# Allegro board PCB.brd
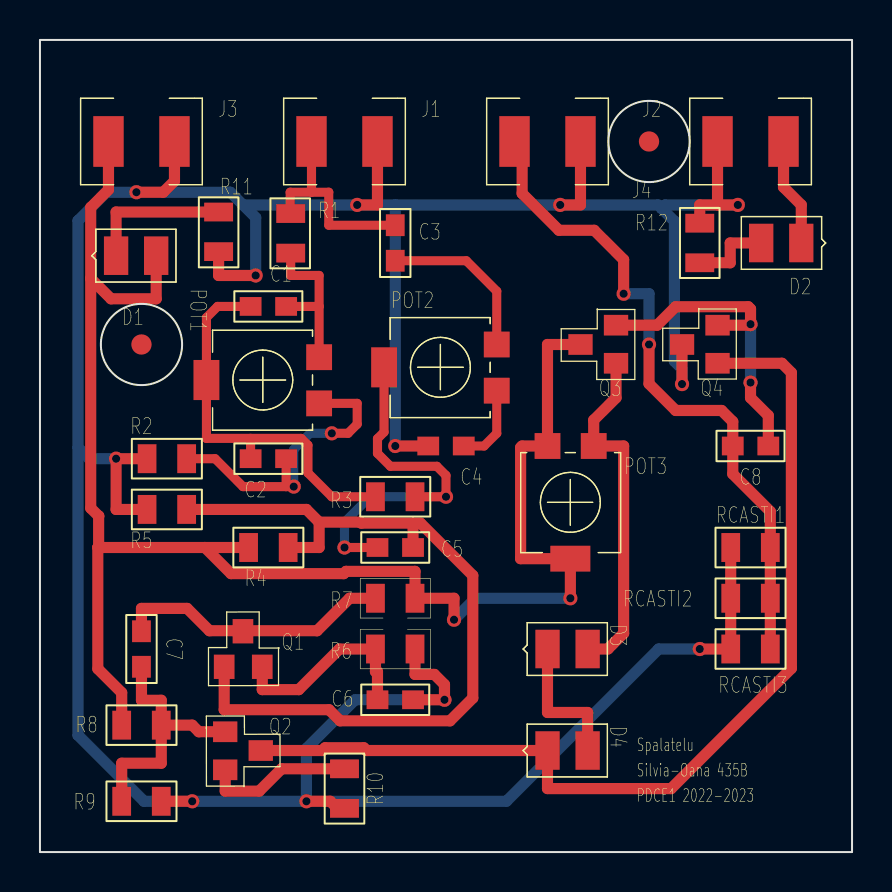
[diagram p0: board, top side]
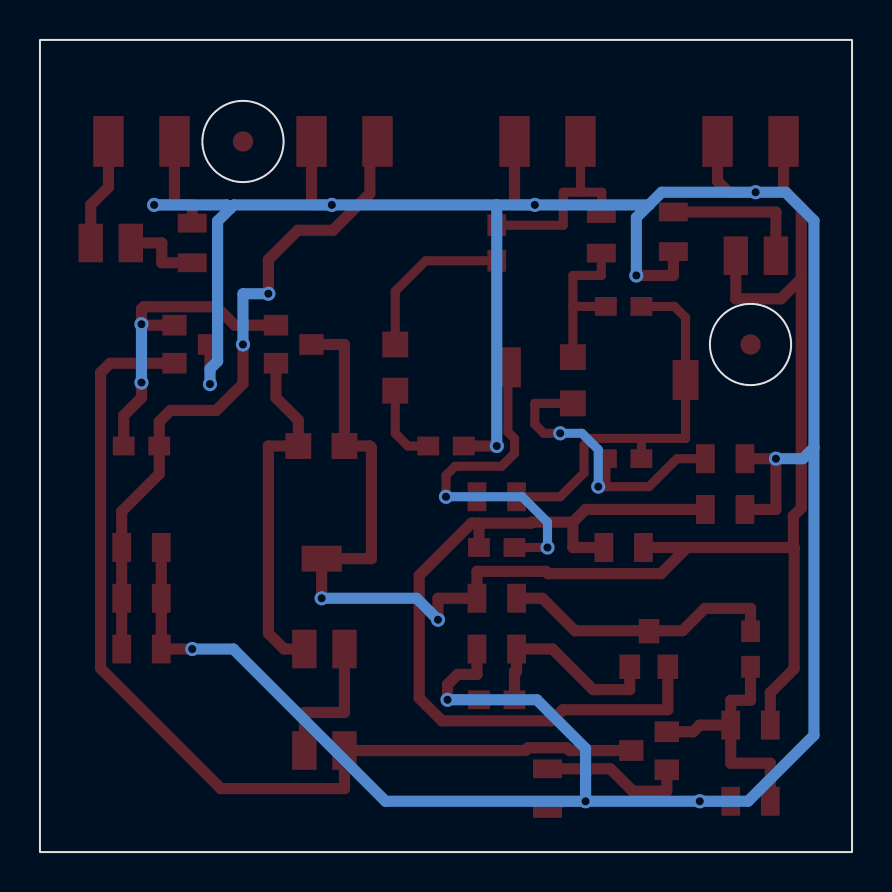
[diagram p1: board, bottom side, seen from below]

Outline 40.64 x 40.64 mm; copper layers: TOP, BOTTOM. Coordinates in mm from the lower left corner of the outline.
Outline path: rectangle 0,0 40.64,40.64

## Design rules (mm)
nets with their own width: min track width 0.457; nets N60447 N60661 N60709 N60871 N61075 N61103 N61107
nets with their own width: min track width 0.559; nets 0 N60475 N60681 N60715 N60839 N60845 N61049 N61099 N61311 N61369 N61405 N62196 N63917 N606950 N610870

## Placement (name value [footprint] x y rotation side)
C1  22n  [CAPC2008X126N_0805]  11.43 27.3 0 top
C2  220n  [CAPC2008X126N_0805]  11.43 19.68 180 top
C3  2.2n  [CAPC2008X126N_0805]  17.78 30.48 90 top
C4  22n  [CAPC2008X126N_0805]  20.32 20.32 0 top
C5  4.7u  [CAPC2008X126N_0805]  17.78 15.24 0 top
C6  4.7u  [CAPC2008X126N_0805]  17.78 7.62 180 top
C7  4.7u  [CAPC2008X126N_0805]  5.08 10.16 270 top
C8  4.7u  [CAPC2008X126N_0805]  35.56 20.32 180 top
D1  LED  [SMD0805]  3.81 29.84 0 top
D2  LED  [SMD0805]  38.1 30.48 180 top
D3  1N4148  [SMD0805]  25.4 10.16 0 top
D4  1N4148  [SMD0805]  25.4 5.08 0 top
J1  IN  [1210RF_WV_12D]  15.24 35.56 0 top
J2  OUT  [1210RF_WV_12D]  25.4 35.56 0 top
J3  VCC  [1210RF_WV_12D]  5.08 35.56 0 top
J4  -VCC  [1210RF_WV_12D]  35.56 35.56 0 top
NOREF  -  []  0 40.64 0 top
NOREF#2  -  [unnamed#2]  5.08 25.4 0 top
NOREF#3  -  [unnamed#2]  30.48 35.56 0 top
NOREF#4  -  []  40.64 0 90 top
POT1  10k  [TS53YL]  13.97 24.77 0 top
POT2  10k  [TS53YL]  22.86 25.4 0 top
POT3  10k  [TS53YL]  25.4 20.32 90 top
Q1  BC846/INF  [SOT23]  10.16 10.16 90 top
Q2  BC846/INF  [SOT23]  10.16 5.08 0 top
Q3  BC846/INF  [SOT23]  27.94 25.4 180 top
Q4  BC856/INF  [SOT23]  33.02 25.4 180 top
R1  1.5k  [RES2012X50N_0805]  12.55 30.96 90 top
R2  51  [RES2012X50N_0805]  6.35 19.68 0 top
R3  2.2k  [RES2012X50N_0805]  17.78 17.78 0 top
R4  220k  [RES2012X50N_0805]  11.43 15.24 180 top
R5  47k  [RES2012X50N_0805]  6.35 17.14 0 top
R6  2.7k  [RES2012X50N_0805]  17.78 10.16 180 top
R7  9.1k  [RES2012X50N_0805]  17.78 12.7 0 top
R8  100k  [RES2012X50N_0805]  5.08 6.35 180 top
R9  6.8K  [RES2012X50N_0805]  5.08 2.54 180 top
R10  220  [RES2012X50N_0805]  15.24 3.17 90 top
R11  1k  [RES2012X50N_0805]  8.94 31.04 90 top
R12  1k  [RES2012X50N_0805]  33.02 30.48 270 top
RCASTI1  1.8k  [RES2012X50N_0805]  35.56 15.24 0 top
RCASTI2  1.8k  [RES2012X50N_0805]  35.56 12.7 0 top
RCASTI3  1.8k  [RES2012X50N_0805]  35.56 10.16 0 top

## Library data of the parts
C1-C8 = C
D1-D4 = 1N4148_0
J1-J4 = CON2
POT1-POT3 = POT
Q1-Q3 = BC846/INF_1
Q4 = BC856/INF_0
R1-R12 RCASTI1-RCASTI3 = R

## Footprints (pads in the part's own frame, mm; a bottom-side part is the same pattern mirrored in y, then rotated)
1210RF_WV_12D
  rect 1.524x2.54 smd: 1(-1.651,0) 2(1.651,0)
CAPC2008X126N_0805
  rect 1.092x0.94 smd: 1(-0.889,0) 2(0.889,0)
RES2012X50N_0805
  rect 0.94x1.448 smd: 1(-0.991,0) 2(0.991,0)
SMD0805
  rect 1.219x1.93 smd: A(2.007,0) C(0,0)
SOT23
  rect 1.219x1.036 smd: 1(-0.889,0.94) 2(-0.889,-0.965) 3(0.889,0)
TS53YL
  rect 1.295x1.295 smd: 1(0,0) 3(0,-2.311)
  rect 1.295x2.007 smd: 2(-5.639,-1.143)
unnamed#2
  round 1.016 smd: (0,0)

## Nets
0: C4.1 C6.1 J1.2 J2.2 J3.2 J4.1 Q4.3 R2.1 R5.1 R6.1 R9.1 R10.1 R11.1 R12.1 RCASTI1.1 RCASTI2.1 RCASTI3.1
N60447: C3.2 J1.1 R1.2
N60475: D1.A J3.1 POT3.1 POT3.2(T) Q3.3 R4.2 R7.2 R8.2
N60661: C1.2 POT1.1 R1.1
N60681: D3.A POT3.3 Q3.1
N60709: C3.1 POT2.1
N60715: C7.2 Q2.1 R8.1 R9.2
N60839: C5.2 Q1.1 R4.1 R5.2
N60845: C7.1 Q1.3 R7.1
N60871: C1.1 C2.2 POT1.2(T) R3.1
N61049: C8.2 J2.1 RCASTI1.2 RCASTI2.2 RCASTI3.2
N61075: C5.1 POT2.2(T) R3.2
N61099: D4.C(CAT) Q2.3 Q4.1
N61103: C2.1 POT1.3 R2.2
N61107: C4.2 POT2.3
N61311: C6.2 Q1.2(E) R6.2
N61369: Q2.2(E) R10.2
N61405: D2.A R12.2
N62196: D2.C(CAT) J4.2
N63917: C8.1 Q3.2(E) Q4.2(E)
N606950: D3.C(CAT) D4.A
N610870: D1.C(CAT) R11.2

## Via types
v1: diameter 0.711, hole 0.406, TOP to BOTTOM, 22 vias

## Routing (per net, layer and track width the routed paths; a pad name or vN(x,y) marks a point on that pad's centre or on a via; arc(x,y) is an arc through that point)
0: length 179.8
  TOP w0.559: J4.1 33.91,32.38 ; 33.91,32.38 v1(34.92,32.38) ; 33.91,32.38 33.02,32.38 R12.1 33.27,31.47 ; v1(4.83,33.02) 6.17,33.02 6.73,33.58 J3.2 ; J1.2 16.89,32.38 v1(15.88,32.38) ; R6.1 18.77,8.89 19.74,8.89 20.24,8.38 v1(20.24,7.62) C6.1 ; C4.1 v1(17.78,20.32) ; v1(13.34,2.54) 14.53,2.54 14.88,2.18 R10.1 ; R11.1 8.94,28.85 v1(10.79,28.85) ; v1(32.13,23.42) Q4.3 ; R9.1 v1(7.62,2.54) ; J2.2 27.05,32.38 v1(26.04,32.38) ; v1(33.02,10.16) RCASTI3.1 RCASTI2.1 RCASTI1.1 ; R2.1 v1(3.81,19.68) 3.81,17.14 R5.1
  BOTTOM w0.559: v1(10.79,28.85) 10.79,31.75 10.16,32.38 ; v1(3.81,19.68) 2.46,19.68 1.91,20.24 ; 31.11,32.21 31.29,32.38 v1(34.92,32.38) ; 31.11,32.21 30.94,32.38 v1(26.04,32.38) 17.78,32.38 ; 31.11,32.21 31.75,31.57 31.75,24.56 32.13,24.18 v1(32.13,23.42) ; 10.16,32.38 v1(15.88,32.38) 17.78,32.38 ; 10.16,32.38 9.53,33.02 v1(4.83,33.02) 3.33,33.02 1.91,31.6 1.91,20.24 ; v1(33.02,10.16) 30.96,10.16 23.34,2.54 v1(13.34,2.54) ; 1.91,20.24 1.91,5.84 5.21,2.54 v1(7.62,2.54) v1(13.34,2.54) ; v1(13.34,2.54) 13.34,5.18 15.77,7.62 v1(20.24,7.62) ; v1(17.78,20.32) 17.78,32.38
N60447: length 10.5
  TOP w0.457: 13.59,33.02 J1.1 ; 13.59,33.02 12.52,33.02 12.52,31.95 R1.2 ; 13.59,33.02 14.45,33.02 14.45,31.37 C3.2
N60475: length 83.7
  TOP w0.559: 2.9,15.24 2.9,9.17 4.09,7.98 R8.2 ; 2.9,15.24 8.26,15.24 ; 2.9,15.24 2.94,15.28 2.94,16.81 ; 2.54,28.7 3.56,27.69 5.82,27.69 D1.A 5.89,29.77 ; 2.54,28.7 2.54,32.26 3.43,33.15 3.43,35.56 ; 2.54,28.7 2.54,17.21 2.94,16.81 ; v1(20.72,11.63) 20.72,12.7 R7.2 18.77,14.05 15.32,14.05 15.2,13.93 9.56,13.93 8.26,15.24 ; 2.95,16.81 2.94,16.81 ; Q3.3 25.4,25.4 POT3.1 24.13,20.32 24.05,20.24 24.05,14.68 POT3.2 v1(26.54,12.7) ; 8.26,15.24 R4.2
  BOTTOM w0.559: v1(26.54,12.7) 21.8,12.7 v1(20.72,11.63)
N60661: length 8.3
  TOP w0.457: 12.32,27.3 13.97,27.3 ; 13.97,27.3 13.97,28.85 12.55,28.85 R1.1 ; 13.97,27.3 POT1.1
N60681: length 17.6
  TOP w0.559: Q3.1 28.83,22.73 27.71,21.62 POT3.3 29.21,20.32 29.21,10.95 28.42,10.16 D3.A
N60709: length 8.4
  TOP w0.457: C3.1 21.34,29.59 22.86,28.07 POT2.1
N60715: length 13
  TOP w0.559: R8.1 7.62,6.35 7.95,6.02 Q2.1 ; R8.1 6.07,4.45 4.09,4.45 R9.2 ; R8.1 6.07,7.59 5.08,7.59 C7.2
N60839: length 41.2
  TOP w0.559: 18.67,16.46 16.08,16.46 16.03,16.51 13.97,16.51 ; 18.67,16.46 C5.2 ; 18.67,16.46 19.04,16.46 21.66,13.84 21.66,7.71 20.52,6.57 15.02,6.57 14.47,7.12 9.22,7.12 Q1.1 ; R4.1 13.97,15.24 13.97,16.51 ; 13.97,16.51 13.34,17.14 R5.2
N60845: length 14
  TOP w0.559: C7.1 5.08,12.19 7.37,12.19 8.48,11.07 10.16,11.07 ; 10.16,11.07 Q1.3 ; 10.16,11.07 13.87,11.07 15.49,12.7 R7.1
N60871: length 20.1
  TOP w0.457: C1.1 8.89,27.3 8.33,26.75 POT1.2 8.33,20.7 10.54,20.7 ; 10.54,20.7 13.07,20.7 13.41,20.36 13.41,18.97 14.61,17.78 R3.1 ; 10.54,20.7 C2.2 10.46,19.68
N61049: length 34
  TOP w0.559: RCASTI3.2 RCASTI2.2 RCASTI1.2 36.55,17.04 34.67,18.92 C8.2 34.67,21.54 34.11,22.1 31.82,22.1 30.48,23.43 v1(30.48,25.4) ; v1(29.21,27.94) 29.21,29.64 27.74,31.11 25.97,31.11 24.13,32.96 24.13,35.56 J2.1
  BOTTOM w0.559: v1(29.21,27.94) 30.48,27.94 v1(30.48,25.4)
N61075: length 19.5
  TOP w0.457: POT2.2 17.22,21.02 16.89,20.69 16.89,19.95 17.54,19.3 19.86,19.3 20.32,18.85 v1(20.32,17.78) R3.2 ; C5.1 v1(15.24,15.24)
  BOTTOM w0.457: v1(20.32,17.78) 16.51,17.78 15.24,16.51 v1(15.24,15.24)
N61099: length 49.8
  TOP w0.559: Q2.3 14.13,5.08 14.27,5.22 16.21,5.22 16.35,5.08 D4.C 25.4,3.17 31.59,3.17 37.6,9.19 37.6,23.99 37.13,24.46 33.91,24.46
N61103: length 15.8
  TOP w0.457: v1(14.61,20.95) 15.42,20.95 15.88,21.41 15.88,22.45 POT1.3 ; v1(12.7,18.29) 12.32,18.29 ; 12.32,18.29 12.32,19.68 ; 12.32,18.29 10.16,18.29 8.76,19.68 R2.2
  BOTTOM w0.457: v1(12.7,18.29) 12.7,20.14 13.51,20.95 v1(14.61,20.95)
N61107: length 4
  TOP w0.457: C4.2 22.23,20.32 22.86,20.95 POT2.3
N61311: length 10.4
  TOP w0.559: Q1.2 11.13,8.13 12.95,8.13 14.99,10.16 R6.2 16.79,9.03 16.89,9.03 C6.2 16.81,7.62
N61369: length 7.6
  TOP w0.559: 9.36,4.11 Q2.2 9.27,3.05 10.97,3.05 12.09,4.17 R10.2
N61405: length 4.1
  TOP w0.559: R12.2 34.54,29.49 34.54,30.48 D2.A
N62196: length 5.4
  TOP w0.559: D2.C 38.1,32.38 37.21,33.27 J4.2
N63917: length 16.1
  TOP w0.559: 33.91,26.37 35.51,26.37 v1(35.56,26.42) 35.56,27.18 35.45,27.29 31.81,27.29 30.89,26.37 Q3.2 ; v1(35.56,23.5) 35.56,22.73 36.45,21.84 36.45,20.32
  BOTTOM w0.559: v1(35.56,26.42) v1(35.56,23.5)
N606950: length 7.1
  TOP w0.559: D4.A 27.41,6.99 25.4,6.99 D3.C
N610870: length 7.3
  TOP w0.559: D1.C 3.81,32.03 R11.2

## Text on the board
Ref Des/Silkscreen Top: Spalatelu | Silvia-Oana 435B | PDCE1 2022-2023
XSECTION_CHART: *  SURFACE | L1 TOP CONDUCTOR | *  DIELECTRIC | L2 BOTTOM CONDUCTOR | DESIGN CROSS SECTION CHART | ___________________________ | TOTAL THICKNESS 60 MIL | 1-2
DIMENSION: FIGURE | FINISHED_SIZE | 16.0 | DRILL CHART: TOP to BOTTOM | ALL UNITS ARE IN MILS | PLATED | QTY | 22 | TOTAL HOLES:
